# Altium PCB betrusted_evtx.PcbDoc (part 2 of 2)
Units mm, origin at the board's own origin, x right, y up, seen from the top; angles counter-clockwise.
Board outline 66 x 88 mm, 2 copper layers (Top Layer, Bottom Layer), stack 0.781 mm thick; 108 components, 62 nets, 1117 pads, 87 vias.
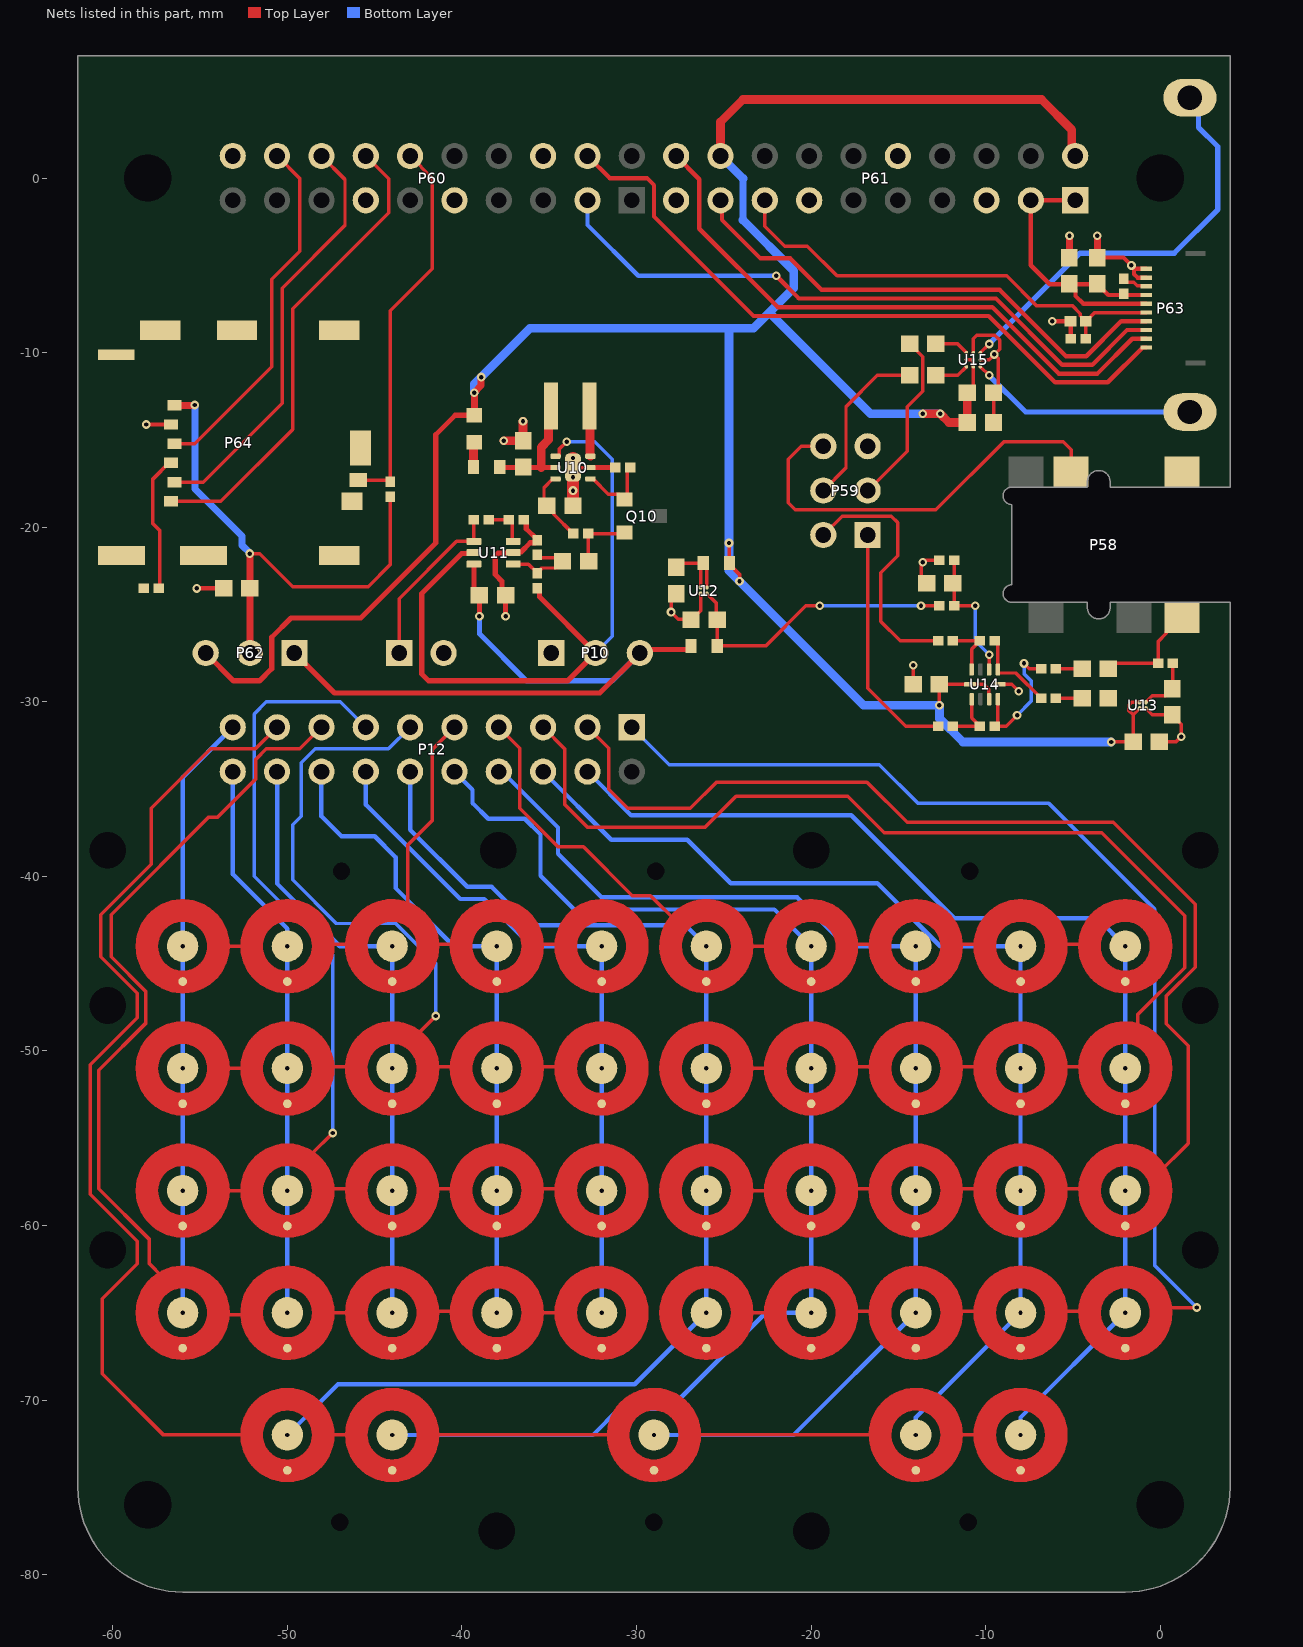
[diagram p2: the nets of this part, all layers, seen from the top]

## Via types
v1: diameter 0.5, hole 0.25, Top Layer to Bottom Layer, tented both sides, 85 vias
v2: diameter 0.5, hole 0.25, Top Layer to Bottom Layer, tented top, 2 vias

## Nets (pads, with @x,y where several pads share a name; then routed paths per layer and width w, separated by ;. In a path a pad name is that pad's centre, name@x,y a point inside that pad or via, vN(x,y) a via of type N, cw(c..) or ccw(c..) an arc to the next point about the centre after c; other vN are vias at no path point)
CTR_NOISE: C12.2 R13.1 R14.2 U11.1 | length 4.9
  Top Layer w0.2: U11.1@-37.065,-22.11 -36.19,-22.11 R13.1@-35.69,-22.61 ; R13.1@-35.69,-22.635 R13.1@-35.69,-22.61 ; R14.2@-35.69,-21.585 -35.515,-21.76 -34.44,-21.76 C12.2@-34.24,-21.96 -34.615,-22.335 -35.415,-22.335 R13.1@-35.69,-22.61
EXTCOMMIN: P61.17 P63.4 | length 29.5
  Top Layer w0.25: P61.17@-25.19,-1.27 -25.105,-1.355 -25.105,-2.395 -22.9,-4.6 -21.2,-4.6 -19.4,-6.4 -9.2,-6.4 -5.4,-10.2 -4.24,-10.2 -2.24,-8.2 P63.4@-0.8,-8.2
GND: C10.2 C11.2 C13.2 C14.2 C15.2 C16.2 C17.2 C18.2 C20.1 C23.2 C24.2 C25.2 C26.2 C27.1 C28.1 C29.1 P10.1 P11.2 P58.4 P59.5 P60.6 P60.9 P60.13 P60.20 P61.5 P61.10 P61.13 P61.19 P63.9 P63.10 P64.0 P64.C5 R14.1 R15.1 R16.1 R25.1 R27.1 R29.1 U10.5 U10.7 U11.2 U12.B2 U13.B2 U14.5 U15.A2 U15.B3 | length 49.1
  Top Layer w0.2: U10.7@-33.64,-16.58 U10.5@-32.64,-16.58 ; C13.2@-27.73,-23.8 -28.02,-24.09 v1(-28.02,-24.86) -27.62,-25.26 -26.92,-25.26 C14.2@-26.88,-25.3 -26.855,-25.3 -26.33,-24.775 U12.B2@-26.33,-23.8 ; C28.1@-14.15,-29 v1(-14.15,-27.9) ; C29.1@-13.375,-23.2 -13.7,-22.875 -13.7,-22.1 v1(-13.6,-22) -13.5,-21.9 R25.1@-12.65,-21.9 ; U15.A2@-10.7,-10 -10.7,-9.2 -10.5,-9 -9.475,-9 -9.2,-9.275 -9.2,-9.8 v1(-9.5,-10.1) ; U15.B3@-10.3,-10.4 -9.8,-10.4 v1(-9.5,-10.1) ; C17.2@-9.55,-14 C18.2@-9.55,-12.3 -9.275,-12.025 -9.275,-10.325 v1(-9.5,-10.1) ; U14.5@-9.2,-29 -8.5,-29 v1(-8.1,-29.4) ; U13.B2@-0.825,-30.375 -0.45,-30.75 C16.2@0.7,-30.75 0.7,-30.775 1.2,-31.275 v1(1.2,-32) 0.9,-32.3 C15.2@-0.05,-32.3
  Top Layer w0.25: v1@-58.1,-14.1 v1(-58.085,-14.115) P64.C5@-56.68,-14.115 ; v1(-55.2,-23.505) -55.195,-23.5 C23.2@-53.65,-23.5 ; v1@-6.2,-8.207 v1(-6.193,-8.2) C24.2@-5.14,-8.2 -5.133,-8.207 -5.133,-9.192 R27.1@-5.125,-9.2 ; C26.2@-3.6,-4.55 -2.1,-4.55 v1@-1.5,-5.15 ; P63.9@-0.8,-5.7 -1.3,-5.7 -1.5,-5.5 v1@-1.5,-5.15 ; P63.10@-0.8,-5.2 -1.45,-5.2 v1@-1.5,-5.15
  Top Layer w0.3: v1(-37.5,-25.1) C27.1@-37.5,-23.9 -37.7,-23.7 -37.7,-23.1 -38.09,-22.71 -38.09,-21.646 -37.914,-21.47 -37.075,-21.47 U11.2@-37.065,-21.46 -37.015,-21.41 -36.61,-21.41 -36.085,-20.885 -35.815,-20.885 -35.69,-20.76 R14.1@-35.69,-20.735 -35.69,-20.71 -36.315,-20.085 -36.315,-19.685 -36.44,-19.56 R15.1@-36.465,-19.56 ; U10.5@-32.64,-16.58 R16.1@-31.215,-16.58
  Top Layer w0.4: C25.2@-5.2,-4.55 v1(-5.2,-3.3) ; C26.2@-3.6,-4.55 v1(-3.6,-3.3)
  Top Layer w0.5: v1(-37.6,-15.05) C10.2@-36.5,-15.05 v1(-36.5,-13.935)
  Top Layer w0.7: C11.2@-33.64,-18.76 v1(-33.64,-17.9) v2(-33.64,-16.03)
  other v1: -1.65,-5
  other v2: -33.64,-17.13
HP_BYP: P58.2 P59.6 | length 24.2
  Top Layer w0.2: P59.6@-19.3,-15.36 -20.56,-15.36 -21.3,-16.1 -21.3,-18.6 -20.9,-19 -12.85,-19 -8.95,-15.1 -5.56,-15.1 -5.1,-15.56 P58.2@-5.1,-16.825
KEY0: P12.9 P13.2 P14.2 P15.2 P16.2 P17.2 | length 17.9
  Top Layer w0.2: -53.65,-44 -52.005,-44 ; -47.5,-43.9 -45.855,-43.9 ; -43.1,-41.7 -43.1,-38.2 -41.7,-36.8 -41.7,-32.73 P12.9@-40.43,-31.46 ; -41.8,-43.9 -40.155,-43.9 ; -35.5,-43.9 -33.855,-43.9
KEY1: P12.11 P23.2 P24.2 P25.2 P26.2 P27.2 | length 35.2
  Top Layer w0.2: -53.65,-51 -52.005,-51 ; -47.5,-50.9 -45.855,-50.9 ; -42.5,-49 v1(-41.5,-48) ; -41.8,-50.9 -40.155,-50.9 ; -35.5,-50.9 -33.855,-50.9
  Bottom Layer w0.2: P12.11@-42.97,-31.46 -44.21,-32.7 -48.4,-32.7 -49.2,-33.5 -49.2,-36.55 -49.7,-37.05 -49.7,-40.2 -47.2,-42.7 -43.79,-42.7 -41.5,-44.99 v1(-41.5,-48)
KEY2: P12.13 P33.2 P34.2 P35.2 P36.2 P37.2 | length 41.6
  Top Layer w0.2: -53.65,-58 -52.005,-58 ; -48.6,-56.1 -48.6,-55.9 v1(-47.4,-54.7) ; -47.5,-57.9 -45.855,-57.9 ; -41.8,-57.9 -40.155,-57.9 ; -35.5,-57.9 -33.855,-57.9
  Bottom Layer w0.2: v1(-47.4,-54.7) -47.4,-44.5 -51.9,-40 -51.9,-30.7 -51.2,-30 -46.97,-30 P12.13@-45.51,-31.46
KEY3: P12.15 P43.2 P44.2 P45.2 P46.2 P47.2 | length 49.4
  Top Layer w0.2: -56,-62.9 -57.2,-62.9 -57.9,-62.2 -57.9,-60.8 -60.8,-57.9 -60.8,-51.1 -58.1,-48.4 -58.1,-46.6 -60.1,-44.6 -60.1,-42.2 -54.5,-36.6 -54,-36.6 -51.8,-34.4 -51.8,-33.3 -51.2,-32.7 -49.29,-32.7 P12.15@-48.05,-31.46 ; -53.9,-65.1 -52.255,-65.1 -52.047,-64.892 ; -47.95,-65 -46.305,-65 ; -41.7,-64.9 -40.055,-64.9 ; -35.95,-65 -34.305,-65
KEY4: P12.7 P18.2 P19.2 P20.2 P21.2 P22.2 | length 23.7
  Top Layer w0.2: P12.7@-37.89,-31.46 -36.7,-32.65 -36.7,-36.1 -34.5,-38.3 -33.04,-38.3 -30.24,-41.1 -29.2,-41.1 -27.592,-42.708 -27.5,-42.8 ; -23.65,-44 -22.005,-44 ; -17.5,-43.9 -15.855,-43.9 ; -11.8,-43.9 -10.155,-43.9 ; -5.5,-43.9 -3.855,-43.9
KEY5: P12.5 P28.2 P29.2 P30.2 P31.2 P32.2 | length 59
  Top Layer w0.2: P12.5@-35.35,-31.46 -34.1,-32.71 -34.1,-35.9 -32.8,-37.2 -26.1,-37.2 -24.3,-35.4 -17.9,-35.4 -15.8,-37.5 -3.35,-37.5 1.4,-42.25 1.4,-45.225 -1.3,-47.925 -1.3,-49 ; -23.65,-51 -22.05,-51 -22.005,-51 ; -17.5,-50.9 -16.048,-50.9 -15.855,-50.9 ; -11.8,-50.9 -10.155,-50.9 ; -5.5,-50.9 -4.048,-50.9 -3.855,-50.9
KEY6: P12.3 P38.2 P39.2 P40.2 P41.2 P42.2 | length 65.8
  Top Layer w0.2: P12.3@-32.81,-31.46 -31.6,-32.67 -31.6,-35 -30.5,-36.1 -26.92,-36.1 -25.42,-34.6 -16.8,-34.6 -14.5,-36.9 -2.7,-36.9 2,-41.6 2,-45.2 0.35,-46.85 0.35,-48.45 1.6,-49.7 1.6,-55.3 -0.172,-57.072 -0.3,-57.2 ; -23.65,-58 -22.005,-58 ; -17.5,-57.9 -15.855,-57.9 ; -11.8,-57.9 -10.155,-57.9 ; -5.5,-57.9 -3.855,-57.9
KEY7: P12.1 P48.2 P49.2 P50.2 P51.2 P52.2 | length 66.6
  Top Layer w0.2: -23.65,-65 -22.005,-65 ; -17.5,-64.9 -15.855,-64.9 ; -11.8,-64.9 -10.155,-64.9 ; -5.5,-64.9 -3.855,-64.9 ; 0.3,-64.7 v1(2.1,-64.7) v1@2.2,-64.8
  Bottom Layer w0.2: P12.1@-30.27,-31.46 -28.13,-33.6 -16.1,-33.6 -13.9,-35.8 -6.4,-35.8 -0.3,-41.9 -0.3,-62.3 v1(2.1,-64.7)
KEY8: P12.17 P53.2 P54.2 P55.2 P56.2 P57.2 | length 82
  Top Layer w0.2: -52.1,-72 -57.1,-72 -60.6,-68.5 -60.6,-64.2 -58.6,-62.2 -58.6,-60.9 -61.3,-58.2 -61.3,-50.8 -58.6,-48.1 -58.6,-46.7 -60.7,-44.6 -60.7,-42.2 -57.8,-39.3 -57.8,-36.1 -54.4,-32.7 -51.83,-32.7 P12.17@-50.59,-31.46 ; -47.5,-72 -45.855,-72 ; -41.95,-72 -31.145,-72 -31.048,-71.902 ; -26.95,-72 -16.412,-72 -16.01,-72.402 ; -11.4,-72 -9.755,-72
KEY9: P12.19 P13.1 P23.1 P33.1 P43.1 | length 34.7
  Bottom Layer w0.25: v1(-56,-65) v1(-56,-58) v1(-56,-51) v1(-56,-44) -56,-34.33 P12.19@-53.13,-31.46
KEY10: P12.20 P14.1 P24.1 P34.1 P44.1 | length 32.3
  Bottom Layer w0.25: P12.20@-53.13,-34 -53.13,-39.87 -50,-43 v1(-50,-44) v1(-50,-51) v1(-50,-58) v1(-50,-65)
KEY11: P12.18 P15.1 P25.1 P35.1 P45.1 | length 35.5
  Bottom Layer w0.25: P12.18@-50.59,-34 -50.59,-40.41 -47,-44 v1(-44,-44) v1(-44,-51) v1(-44,-58) v1(-44,-65)
KEY12: P12.16 P16.1 P26.1 P36.1 P46.1 | length 37.7
  Bottom Layer w0.25: P12.16@-48.05,-34 -48.05,-36.55 -46.9,-37.7 -45,-37.7 -43.8,-38.9 -43.8,-40.67 -40.47,-44 v1(-38,-44) v1(-38,-51) v1(-38,-58) v1(-38,-65)
KEY13: P12.14 P17.1 P27.1 P37.1 P47.1 | length 39.8
  Bottom Layer w0.25: P12.14@-45.51,-34 -45.51,-35.89 -40.1,-41.3 -38.714,-41.3 -36.014,-44 v1(-32,-44) v1(-32,-51) v1(-32,-58) v1(-32,-65)
KEY14: P12.12 P18.1 P28.1 P38.1 P48.1 P53.1 | length 71
  Bottom Layer w0.25: v1(-50,-72) -47.1,-69.1 -30.1,-69.1 v1(-26,-65) v1(-26,-58) v1(-26,-51) v1(-26,-44) -27.2,-42.8 -36.1,-42.8 -38.3,-40.6 -39.7,-40.6 -42.97,-37.33 P12.12@-42.97,-34
KEY15: P12.10 P19.1 P29.1 P39.1 P49.1 P54.1 | length 74.3
  Bottom Layer w0.25: v1(-44,-72) -32.5,-72 -31,-70.5 -28.1,-70.5 -22.6,-65 v1(-20,-65) v1(-20,-58) v1(-20,-51) v1(-20,-44) -22.1,-41.9 -33.57,-41.9 -35.5,-39.97 -35.5,-37.6 -36.4,-36.7 -38.5,-36.7 -39.395,-35.805 -39.395,-35.035 P12.10@-40.43,-34
KEY16: P12.8 P20.1 P30.1 P40.1 P50.1 P55.1 | length 67.8
  Bottom Layer w0.25: P12.8@-37.89,-34 -37.7,-34 -34.5,-37.2 -34.5,-38.7 -32,-41.2 -20.8,-41.2 -18,-44 v1(-14,-44) v1(-14,-51) v1(-14,-58) v1(-14,-65) -21,-72 v1(-29,-72)
KEY17: P12.6 P21.1 P31.1 P41.1 P51.1 P56.1 | length 62
  Bottom Layer w0.25: P12.6@-35.35,-34 -31.45,-37.9 -27.1,-37.9 -24.6,-40.4 -16.2,-40.4 -12.6,-44 v1(-8,-44) v1(-8,-51) v1(-8,-58) v1(-8,-65) -14,-71 v1(-14,-72)
KEY18: P12.4 P22.1 P32.1 P42.1 P52.1 P57.1 | length 65.4
  Bottom Layer w0.25: P12.4@-32.81,-34 -30.31,-36.5 -17.7,-36.5 -11.8,-42.4 -3.6,-42.4 v1(-2,-44) v1(-2,-51) v1(-2,-58) v1(-2,-65) -8,-71 v1(-8,-72)
LCD_DISP: C24.1 P61.15 P63.5 R27.2 | length 26.9
  Top Layer w0.2: P61.15@-22.65,-1.27 -22.65,-2.75 -21.5,-3.9 -20.215,-3.9 -18.515,-5.6 -8.8,-5.6 -7.1,-7.3 -5.05,-7.3 -4.585,-7.765 -4.585,-7.895 -4.28,-8.2 C24.1@-4.26,-8.2 ; R27.2@-4.275,-9.2 -4.26,-9.185 C24.1@-4.26,-8.2 ; P63.5@-0.8,-7.7 -3.74,-7.7 -4.24,-8.2 C24.1@-4.26,-8.2
LCD_SCLK: P60.4 P63.1 | length 39.3
  Top Layer w0.25: P60.4@-32.81,1.27 -31.54,0 -29.4,0 -29,-0.4 -29,-2.2 -23.3,-7.9 -9.821,-7.9 -6.021,-11.7 -3,-11.7 -1,-9.7 P63.1@-0.8,-9.7
LCD_SCS: P60.3 P63.3 | length 37.6
  Top Layer w0.25: v1(-22,-5.6) -20.7,-6.9 -9.407,-6.9 -5.607,-10.7 -3.9,-10.7 -1.9,-8.7 P63.3@-0.8,-8.7
  Bottom Layer w0.25: P60.3@-32.81,-1.27 -32.81,-2.69 -29.9,-5.6 v1(-22,-5.6)
LCD_SI: P61.20 P63.2 | length 34.6
  Top Layer w0.25: P61.20@-27.73,1.27 -26.4,-0.06 -26.4,-2.9 -21.9,-7.4 -9.614,-7.4 -5.814,-11.2 -3.6,-11.2 -1.6,-9.2 P63.2@-0.8,-9.2
MICBIAS: C16.1 R18.2 U13.A2 | length 3.3
  Top Layer w0.2: U13.A2@-0.825,-30.025 -0.45,-29.65 0.325,-29.65 0.725,-29.25 R18.2@0.725,-27.8
NetC19_1: C19.1 P58.1 R18.1 | length 6.2
  Top Layer w0.2: C19.1@-2.97,-28.1 -2.67,-27.8 R18.1@-0.125,-27.8 -0.125,-26.55 0.35,-26.075 0.35,-25.95 1.125,-25.175 P58.1@1.25,-25.175
NetC19_2: C19.2 R21.2 | length 1.5
  Top Layer w0.2: R21.2@-5.975,-28.1 C19.2@-4.47,-28.1
NetC20_2: C20.2 R19.2 | length 1.5
  Top Layer w0.2: R19.2@-5.975,-29.8 C20.2@-4.47,-29.8
NetC21_1: C21.1 U15.C1 | length 2
  Top Layer w0.2: C21.1@-12.85,-11.3 -11.6,-11.3 U15.C1@-11.1,-10.8
NetC21_2: C21.2 P59.4 | length 9.7
  Top Layer w0.2: P59.4@-19.3,-17.9 -18,-16.6 -18,-13.1 -16.2,-11.3 C21.2@-14.35,-11.3
NetC22_1: C22.1 P59.3 | length 10
  Top Layer w0.2: P59.3@-16.76,-17.9 -14.5,-15.64 -14.5,-13.1 -13.6,-12.2 -13.6,-10.225 -14.325,-9.5 C22.1@-14.35,-9.5
NetC22_2: C22.2 U15.A1 | length 2
  Top Layer w0.2: C22.2@-12.85,-9.5 -11.6,-9.5 U15.A1@-11.1,-10
NetP59_1: P59.1 R22.1 | length 13.7
  Top Layer w0.2: P59.1@-16.76,-20.44 -16.76,-29.215 -14.575,-31.4 R22.1@-12.725,-31.4
NetP59_2: P59.2 R20.1 | length 14.7
  Top Layer w0.2: P59.2@-19.3,-20.44 -18.22,-19.36 -15.4,-19.36 -15.03,-19.73 -15.03,-21.63 -16,-22.6 -16,-25.4 -14.9,-26.5 R20.1@-12.725,-26.5
NetP63_8: P63.8 R28.1 | length 1.5
  Top Layer w0.2: R28.1@-2.1,-5.775 -2.1,-5.8 -1.925,-5.975 -1.525,-5.975 -1.325,-6.175 -0.825,-6.175 P63.8@-0.8,-6.2
NetP64_C6: P64.C6 R29.2 | length 7.9
  Top Layer w0.2: R29.2@-57.375,-23.5 -57.3,-23.425 -57.3,-20.2 -57.7,-19.8 -57.7,-17.235 -56.78,-16.315 P64.C6@-56.68,-16.315
NetR11_2: R11.2 R15.2 U11.3 | length 2.5
  Top Layer w0.2: R11.2@-38.465,-19.56 R15.2@-37.315,-19.56 -37.29,-19.56 -37.115,-19.735 -37.115,-20.76 U11.3@-37.065,-20.81
NetR17_1: R17.1 R20.2 U14.9 | length 3.4
  Top Layer w0.2: R20.2@-11.875,-26.5 R17.1@-10.35,-26.5 ; U14.9@-10.8,-28.15 -10.8,-26.975 -10.525,-26.7 -10.525,-26.675 R17.1@-10.35,-26.5 ; R17.1@-10.325,-26.5 R17.1@-10.35,-26.5
NetR17_2: R17.2 R19.1 U14.6 | length 5
  Top Layer w0.2: R17.2@-9.475,-26.5 -9.3,-26.675 U14.6@-9.3,-28.15 -9.3,-28.325 -9.275,-28.35 -8.275,-28.35 R19.1@-6.825,-29.8
NetR21_1: R21.1 R24.2 U14.4 | length 7.7
  Top Layer w0.2: U14.4@-9.3,-29.85 -9.3,-31.225 R24.2@-9.475,-31.4 -8.825,-31.4 v1(-8.2,-30.775) ; v1(-7.8,-27.8) -7.5,-28.1 R21.1@-6.825,-28.1
  Bottom Layer w0.2: v1(-8.2,-30.775) -7.4,-29.975 -7.4,-28.8 -7.8,-28.4 v1(-7.8,-27.8)
NetR22_2: R22.2 R24.1 U14.1 | length 3.3
  Top Layer w0.2: R22.2@-11.875,-31.4 R24.1@-10.35,-31.4 ; U14.1@-10.8,-29.85 -10.8,-30.925 -10.525,-31.2 -10.525,-31.225 R24.1@-10.35,-31.4 ; R24.1@-10.325,-31.4 R24.1@-10.35,-31.4
NetTP10_1: TP10.1 U15.A3 | length 24.1
  Top Layer w0.2: U15.A3@-10.3,-10 v1(-9.8,-9.5)
  Bottom Layer w0.3: v1(-9.8,-9.5) -4.6,-4.3 0.8,-4.3 3.3,-1.8 3.3,1.8 2.2,2.9 2.2,4.1 TP10.1@1.7,4.6
NetTP11_1: TP11.1 U15.C3 | length 13.1
  Top Layer w0.2: U15.C3@-10.3,-10.8 v1(-9.8,-11.3)
  Bottom Layer w0.3: v1(-9.8,-11.3) -7.7,-13.4 TP11.1@1.7,-13.4
NOISE: P11.1 R11.1 U11.4 | length 10
  Top Layer w0.2: P11.1@-43.59,-27.2 -43.59,-24.09 -40.31,-20.81 U11.4@-39.315,-20.81 R11.1@-39.315,-19.56
NOISE_ON: P10.2 R13.2 U10.1 U11.5 | length 40.1
  Top Layer w0.2: U10.1@-34.64,-15.93 -34.49,-15.93 -34.44,-15.88 -34.44,-15.54 v1(-34,-15.1)
  Top Layer w0.3: U11.5@-39.315,-21.46 -39.365,-21.51 -40.01,-21.51 -42.3,-23.8 -42.3,-28.4 -41.9,-28.8 -33.95,-28.8 P10.2@-32.35,-27.2 -35.565,-23.985 -35.565,-23.61 R13.2@-35.69,-23.485
  Bottom Layer w0.2: v1(-34,-15.1) -32.4,-15.1 -31.4,-16.1 -31.4,-26.25 P10.2@-32.35,-27.2
NPN_NOISE: C12.1 Q10.2 R12.1 | length 3.7
  Top Layer w0.2: C12.1@-32.74,-21.96 -32.765,-21.935 R12.1@-32.765,-20.36 -30.74,-20.36 Q10.2@-30.69,-20.31
P1.8V: C14.1 C27.2 J12.1 P10.3 P62.1 R23.2 U11.6 U12.A2 | length 56.8
  Top Layer w0.2: U12.A2@-25.98,-23.8 -25.42,-24.36 -25.42,-25.26 C14.1@-25.38,-25.3 J12.1@-25.38,-26.8 -22.6,-26.8 -20.3,-24.5 v1(-19.5,-24.5) ; v1(-13.7,-24.5) R23.2@-12.65,-24.5
  Top Layer w0.3: P62.1@-49.6,-27.2 -47.3,-29.5 -32.11,-29.5 P10.3@-29.81,-27.2 -29.61,-27 -27.055,-27 -26.88,-26.825 J12.1@-26.88,-26.8 ; U11.6@-39.315,-22.11 -39.315,-23.585 C27.2@-39,-23.9 v1(-39,-25.1)
  Bottom Layer w0.2: v1(-19.5,-24.5) v1(-13.7,-24.5)
  Bottom Layer w0.3: v1(-39,-25.1) -39,-26.1 -36.3,-28.8 -31.41,-28.8 P10.3@-29.81,-27.2
P3.3V: C13.1 C15.1 C17.1 C18.1 C28.2 J11.1 P61.2 P61.18 P62.3 R10.2 U12.A1 U12.B1 U13.A1 U13.B1 U14.3 U14.10 U15.B1 U15.B2 U15.C2 | length 160.5
  Top Layer w0.2: C13.1@-27.73,-22.3 -27.49,-22.06 J11.1@-26.17,-22.06 ; U12.B1@-26.33,-23.45 -26.33,-22.22 J11.1@-26.17,-22.06 ; U12.A1@-25.98,-23.45 -25.98,-22.25 J11.1@-26.17,-22.06 ; v1(-24.7,-20.9) -24.7,-22.03 J11.1@-24.67,-22.06 -24.67,-22.135 -24.1,-22.705 v1(-24.1,-23.1) ; v1(-12.65,-30.2) C28.2@-12.65,-29 U14.10@-10.9,-29 -10.1,-29 -9.825,-29.275 -9.825,-29.825 U14.3@-9.8,-29.85 ; U15.B1@-11.1,-10.4 U15.B2@-10.7,-10.4 U15.C2@-10.7,-10.8 -10.7,-11.95 C18.1@-11.05,-12.3 ; v1(-2.8,-32.3) C15.1@-1.55,-32.3 -1.55,-30.75 ; U13.B1@-1.175,-30.375 -1.55,-30.75 ; U13.A1@-1.175,-30.025 -1.625,-30.025 -1.8,-30.2 -1.8,-30.5 -1.55,-30.75
  Top Layer w0.3: P62.3@-54.68,-27.2 -53.08,-28.8 -51.6,-28.8 -50.9,-28.1 -50.9,-26.3 -49.8,-25.2 -45.8,-25.2 -41.5,-20.9 -41.5,-14.7 -40.385,-13.585 R10.2@-39.29,-13.585
  Top Layer w0.4: R10.2@-39.29,-13.585 v1(-39.29,-12.3) -39.29,-12.273 -38.9,-11.883 v1(-38.9,-11.4)
  Top Layer w0.5: P61.18@-25.19,1.27 -25.19,3.21 -23.9,4.5 -6.8,4.5 -5.061,2.761 -5.061,1.461 P61.2@-4.87,1.27 ; v1(-13.6,-13.5) v1(-12.6,-13.5) -12.1,-14 C17.1@-11.05,-14 C18.1@-11.05,-12.3
  Bottom Layer w0.3: -24.8,-8.6 -24.7,-8.7
  Bottom Layer w0.4: -23.9,-2.4 -23.9,-0.02
  Bottom Layer w0.5: v1(-39.29,-12.3) -39.29,-11.79 -36.1,-8.6 -24.8,-8.6 -23.3,-8.6 -22.4,-7.7 ; P61.18@-25.19,1.27 -23.9,-0.02 ; -24.7,-8.7 v1(-24.7,-20.9) -24.7,-22.5 -17,-30.2 v1(-12.65,-30.2) -12.65,-30.95 -11.3,-32.3 v1(-2.8,-32.3) ; -23.9,-2.4 -21,-5.3 -21,-6.3 -22.4,-7.7 ; v1(-12.6,-13.5) -16.6,-13.5 -22.4,-7.7
P5.0V: C25.1 C26.1 P61.1 P61.3 P63.6 P63.7 R28.2 | length 18.6
  Top Layer w0.25: P61.1@-4.87,-1.27 P61.3@-7.41,-1.27 -7.41,-4.99 -6.325,-6.075 C25.1@-5.175,-6.075 ; P63.6@-0.8,-7.2 -4.4,-7.2 -4.85,-6.75 -4.85,-6.4 C25.1@-5.175,-6.075 ; P63.7@-0.8,-6.7 -2.975,-6.7 -3.6,-6.075 C25.1@-5.175,-6.075
SIM_CLK: P60.16 P64.C3 | length 24.3
  Top Layer w0.2: P64.C3@-56.48,-17.415 -54.815,-17.415 -50.3,-12.9 -50.3,-6.3 -46.7,-2.7 -46.7,-0.08 P60.16@-48.05,1.27
SIM_DET: P60.12 P64.SW R26.1 | length 22.1
  Top Layer w0.2: P64.SW@-45.93,-17.3 -44.2,-17.3 R26.1@-44.1,-17.4 -44.1,-7.6 -41.7,-5.2 -41.7,0 P60.12@-42.97,1.27
SIM_IO: P60.14 P64.C7 | length 27.2
  Top Layer w0.2: P64.C7@-56.68,-18.515 -53.815,-18.515 -49.7,-14.4 -49.7,-7.49 -44.2,-1.99 -44.2,-0.04 P60.14@-45.51,1.27
SIM_RST: P60.18 P64.C2 | length 20.7
  Top Layer w0.2: P64.C2@-56.48,-15.215 -55.315,-15.215 -50.9,-10.8 -50.9,-5.8 -49.3,-4.2 -49.3,-0.02 P60.18@-50.59,1.27
SIM_VCC: C23.1 P62.2 P64.C1 R26.2 | length 29.9
  Top Layer w0.2: v1(-52.15,-21.51) -51.59,-21.51 -49.7,-23.4 -45.365,-23.4 -44.1,-22.135 R26.2@-44.1,-18.25
  Top Layer w0.4: P64.C1@-56.48,-13.015 -55.315,-13.015 v1(-55.3,-13) ; v1(-52.15,-21.51) C23.1@-52.15,-23.5 -52.145,-23.505 -52.145,-27.195 P62.2@-52.14,-27.2
  Bottom Layer w0.4: v1(-55.3,-13) -55.3,-17.8 -52.6,-20.5 -52.6,-21.033 -52.15,-21.483 v1(-52.15,-21.51)
VAVA: C11.1 R12.2 U10.3 | length 4.2
  Top Layer w0.2: U10.3@-34.64,-17.23 -34.79,-17.23 -35.3,-17.74 -35.3,-18.6 C11.1@-35.14,-18.76 -35.115,-18.76 -34.74,-19.135 -34.74,-19.26 -33.64,-20.36 R12.2@-33.615,-20.36
VAVA_FBK: Q10.1 R16.2 U10.4 | length 4.4
  Top Layer w0.2: U10.4@-32.64,-17.23 -32.49,-17.23 -31.61,-18.11 -30.99,-18.11 Q10.1@-30.69,-18.41 -30.54,-18.26 -30.54,-16.755 R16.2@-30.365,-16.58
VAVA_SW: L10.2 U10.6 | length 2.9
  Top Layer w0.5: L10.2@-32.69,-13.06 -32.665,-13.085 -32.665,-15.905 U10.6@-32.64,-15.93
VOCM: C29.2 R23.1 R25.2 U14.7 | length 7.8
  Top Layer w0.2: R25.2@-11.8,-21.9 R23.1@-11.8,-24.5 v1(-10.6,-24.5) ; U14.7@-9.8,-28.15 v1(-9.8,-27.3)
  Bottom Layer w0.2: v1(-10.6,-24.5) -10.6,-26.5 v1(-9.8,-27.3)
VSYS: C10.1 J10.1 L10.1 R10.1 U10.2 | length 8.4
  Top Layer w0.2: R10.1@-39.34,-15.185 R10.1@-39.29,-15.135 R10.1@-39.265,-15.135 ; J10.1@-37.84,-16.56 J10.1@-37.82,-16.58
  Top Layer w0.3: J10.1@-37.82,-16.58 -35.465,-16.58 U10.2@-34.64,-16.58
  Top Layer w0.5: J10.1@-39.34,-16.56 R10.1@-39.34,-15.185 ; -35.465,-16.58 -35.465,-15.415 -35.04,-14.99 -35.04,-13.21 L10.1@-34.89,-13.06
pads on no net: P12.2 P58.3 P58.5 P58.6 P60.1 P60.2 P60.5 P60.7 P60.8 P60.10 P60.11 P60.15 P60.17 P60.19 P61.4 P61.6 P61.7 P61.8 P61.9 P61.11 P61.12 P61.14 P61.16 P63.0 Q10.3 U10.0 U14.2 U14.8

## Polygon pours and split planes (outlines as drawn)
GND on Bottom Layer "gnd-poly" (solid, remove dead copper, pour order 0): -62,-31.5 -22.2,-31.5 -19.1,-34.6 4,-34.6 4,7 -62,7
GND on Top Layer "gnd_top" (solid, remove dead copper, pour order 2): -62,-31.5 -22.3,-31.5 -20.3,-33.5 -15.9,-33.5 -14.8,-34.6 4,-34.6 4,7 -62,7

## Keep-outs
Keep-Out Layer:
  lines w0.5: 4,-24.3 4,-75 cw(c-2,-75) -2,-81 -56,-81 cw(c-56,-75) -62,-75 -62,7 4,7 4,-17.7

## Silkscreen, mask and mechanical layers (free items; w line width, h text height)
Top Overlay:
  lines w0.2: -41.373,-9.328 ccw(c-40.506,-9.328) -40.506,-10.196 -33.245,-10.196 ccw(c-33.245,-9.18) -32.229,-9.18 -32.229,-4.608 ccw(c-33.245,-4.608) -33.245,-3.592 -40.357,-3.592 ccw(c-40.357,-4.608) -41.373,-4.608 -41.373,-9.328
  text "betrusted.io XT1" at -31.5,-5.282 h1.4
  text "Designed in" at -31.529,-6.729 h1.4
  text "Singapore" at -31.556,-7.924 h1.4
  text "02/19" at -31.541,-9.38 h1.4
  text "HP" at -21.25,-17 h1 r90
  text "MIC" at -21.25,-20.75 h1 r90
  text "3.3" at -55.3,-29.75 h1
  text "1.8" at -51.25,-29.75 h1
  text "OUT" at -45.25,-29.75 h1
  text "GND" at -41.75,-29.75 h1
  text "OFF" at -35.5,-29.75 h1
  text "ON" at -31.25,-29.75 h1
Bottom Overlay:
  circle w0.2: c-38.229,-8.35 r0.811
  rectangle: -18.75,-71.25 1.75,-64.75
  text "c  2019 Sutajio Ko-Usagi" at -37.816,-8.809 h2
  text "Copyrights: CERN OHL v1.2" at -37.716,-10.859 h2
  text "Patents: Apache 2.0" at -37.754,-12.8 h2
  text "bunnie@kosagi.com" at -37.754,-14.5 h1.5
Top Solder:
  rectangle: 0,-2.75 4,2.75
  rectangle: -62,-34.25 -58.25,-25.5
  rectangle: -62,-2.75 -57.75,7
Bottom Solder:
  rectangle: 0,-2.75 4,2.75
  rectangle: -10,4 -2,7
  rectangle: -62,-2.75 -57.75,7
  rectangle: -62,-34.25 -58.25,-25.5
Mechanical 1:
  the board outline again, w0.1
  text "Board cutting outline" at -45.75,9.75 h2
Mechanical 3:
  drawing of 191 lines, arcs and shapes, not listed
  text "Layer" at 18.909,1.454 h1.52
  text "Name" at 29.32,1.454 h1.52
  text "Material" at 52.936,1.454 h1.52
  text "Thickness" at 74.774,1.454 h1.52
  text "Constant" at 91.28,1.454 h1.52
  text "Board Layer Stack" at 105.754,1.454 h1.52
  text "1" at 18.909,-1.594 h1.52
  text "Top Overlay" at 29.32,-1.594 h1.52
  text "2" at 18.909,-4.642 h1.52
  text "Top Solder" at 29.32,-4.642 h1.52
  text "Solder Resist" at 52.936,-4.642 h1.52
  text "0.010mm" at 74.774,-4.642 h1.52
  text "3.5" at 91.28,-4.642 h1.52
  text "3" at 18.909,-7.69 h1.52
  text "Top Layer" at 29.32,-7.69 h1.52
  text "Copper" at 52.936,-7.69 h1.52
  text "0.036mm" at 74.774,-7.69 h1.52
  text "4" at 18.909,-10.738 h1.52
  text "Dielectric 1" at 29.32,-10.738 h1.52
  text "FR-4" at 52.936,-10.738 h1.52
  text "0.710mm" at 74.774,-10.738 h1.52
  text "4.8" at 91.28,-10.738 h1.52
  text "5" at 18.909,-13.786 h1.52
  text "Bottom Layer" at 29.32,-13.786 h1.52
  text "Copper" at 52.936,-13.786 h1.52
  text "0.036mm" at 74.774,-13.786 h1.52
  text "6" at 18.909,-16.834 h1.52
  text "Bottom Solder" at 29.32,-16.834 h1.52
  text "Solder Resist" at 52.936,-16.834 h1.52
  text "0.010mm" at 74.774,-16.834 h1.52
  text "3.5" at 91.28,-16.834 h1.52
  text "7" at 18.909,-19.882 h1.52
  text "Bottom Overlay" at 29.32,-19.882 h1.52
  text "Total thickness: 0.8mm +/-0.1mm" at 19.75,-25.1 h2
  text "Finish: immersion gold" at 19.5,-30 h2
  text "Soldermask color: green" at 19.25,-35.25 h2
  text "Silkscreen: white" at 19,-41 h2
Drill Drawing:
  circle w0.254: c19.056,-52.708 r0.847
  lines w0.254: 18.209,-72.182 18.633,-72.182 19.056,-72.605 19.479,-72.182 19.903,-72.182 19.479,-71.758 19.903,-71.335 19.479,-71.335 19.056,-70.912 18.633,-71.335 18.209,-71.335 18.633,-71.758 18.209,-72.182 ; 18.209,-68.795 19.903,-68.795 19.903,-67.102 18.209,-67.102 18.209,-68.795 ; 18.209,-64.562 18.633,-64.562 18.633,-64.985 19.479,-64.985 19.479,-64.562 19.903,-64.562 19.903,-63.715 19.479,-63.715 19.479,-63.292 18.633,-63.292 18.633,-63.715 18.209,-63.715 18.209,-64.562 ; 18.209,-61.175 19.056,-60.752 19.903,-61.175 19.479,-60.328 19.903,-59.482 19.056,-59.905 18.209,-59.482 18.633,-60.328 18.209,-61.175 ; 18.209,-55.672 19.903,-55.672 19.056,-57.365 18.209,-55.672
  lines w0.381: 16.691,-73.748 357.767,-73.748 ; 16.691,-50.888 357.767,-50.888 ; 30.683,-77.558 30.683,-47.078 ; 45.665,-77.558 45.665,-47.078 ; 74.866,-77.558 74.866,-47.078 ; 87.715,-77.558 87.715,-47.078 ; 106.354,-77.558 106.354,-47.078 ; 144.443,-77.558 144.443,-47.078 ; 159.425,-77.558 159.425,-47.078 ; 178.368,-77.558 178.368,-47.078 ; 204.269,-77.558 204.269,-47.078 ; 225.954,-77.558 225.954,-47.078 ; 259.828,-77.558 259.828,-47.078 ; 293.701,-77.558 293.701,-47.078 ; 322.141,-77.558 322.141,-47.078 ; 16.691,-77.558 357.767,-77.558 357.767,-47.078 16.691,-47.078 16.691,-77.558
  text "Symbol" at 18.977,-49.745 h1.83
  text "Count" at 31.826,-49.745 h1.83
  text "Hole Size" at 46.808,-49.745 h1.83
  text "Plated" at 76.009,-49.745 h1.83
  text "Hole Type" at 88.858,-49.745 h1.83
  text "Drill Layer Pair" at 107.497,-49.745 h1.83
  text "Via/Pad" at 145.586,-49.745 h1.83
  text "Pad Shape" at 160.568,-49.745 h1.83
  text "Template" at 179.511,-49.745 h1.83
  text "Description" at 205.412,-49.745 h1.83
  text "Hole Tolerance (+)" at 227.097,-49.745 h1.83
  text "Hole Tolerance (-)" at 260.971,-49.745 h1.83
  text "Hole Length" at 294.844,-49.745 h1.83
  text "Routed Path Length" at 323.284,-49.745 h1.83
  text "2" at 31.826,-53.555 h1.52
  text "1.397mm (55.00mil)" at 46.808,-53.555 h1.52
  text "PTH" at 76.009,-53.555 h1.52
  text "Round" at 88.858,-53.555 h1.52
  text "Top Layer - Bottom Layer" at 107.497,-53.555 h1.52
  text "Pad" at 145.586,-53.555 h1.52
  text "Rounded" at 160.568,-53.555 h1.52
  text "r305_216h140r100" at 179.511,-53.555 h1.52
  text "-" at 294.844,-53.555 h1.52
  text "-" at 323.284,-53.555 h1.52
  text "4" at 31.826,-57.365 h1.52
  text "2.700mm (106.30mil)" at 46.808,-57.365 h1.52
  text "NPTH" at 76.009,-57.365 h1.52
  text "Round" at 88.858,-57.365 h1.52
  text "Top Layer - Bottom Layer" at 107.497,-57.365 h1.52
  text "Pad" at 145.586,-57.365 h1.52
  text "Rounded" at 160.568,-57.365 h1.52
  text "c250hn270m400" at 179.511,-57.365 h1.52
  text "-" at 294.844,-57.365 h1.52
  text "-" at 323.284,-57.365 h1.52
  text "6" at 31.826,-61.175 h1.52
  text "1.000mm (39.37mil)" at 46.808,-61.175 h1.52
  text "NPTH" at 76.009,-61.175 h1.52
  text "Slot" at 88.858,-61.175 h1.52
  text "Top Layer - Bottom Layer" at 107.497,-61.175 h1.52
  text "Pad" at 145.586,-61.175 h1.52
  text "Rectangle" at 160.568,-61.175 h1.52
  text "s0hn100_300" at 179.511,-61.175 h1.52
  text "3.000mm (118.11mil)" at 294.844,-61.175 h1.52
  text "2.000mm (78.74mil)" at 323.284,-61.175 h1.52
  text "10" at 31.826,-64.985 h1.52
  text "2.100mm (82.68mil)" at 46.808,-64.985 h1.52
  text "NPTH" at 76.009,-64.985 h1.52
  text "Round" at 88.858,-64.985 h1.52
  text "Top Layer - Bottom Layer" at 107.497,-64.985 h1.52
  text "Pad" at 145.586,-64.985 h1.52
  text "Rectangle" at 160.568,-64.985 h1.52
  text "s0hn210" at 179.511,-64.985 h1.52
  text "-" at 294.844,-64.985 h1.52
  text "-" at 323.284,-64.985 h1.52
  text "74" at 31.826,-68.795 h1.52
  text "0.900mm (35.43mil)" at 46.808,-68.795 h1.52
  text "PTH" at 76.009,-68.795 h1.52
  text "Round" at 88.858,-68.795 h1.52
  text "Top Layer - Bottom Layer" at 107.497,-68.795 h1.52
  text "Pad" at 145.586,-68.795 h1.52
  text "(Mixed)" at 160.568,-68.795 h1.52
  text "(Mixed)" at 179.511,-68.795 h1.52
  text "-" at 294.844,-68.795 h1.52
  text "-" at 323.284,-68.795 h1.52
  text "87" at 31.826,-72.605 h1.52
  text "0.250mm (9.84mil)" at 46.808,-72.605 h1.52
  text "PTH" at 76.009,-72.605 h1.52
  text "Round" at 88.858,-72.605 h1.52
  text "Top Layer - Bottom Layer" at 107.497,-72.605 h1.52
  text "Via" at 145.586,-72.605 h1.52
  text "Rounded" at 160.568,-72.605 h1.52
  text "(Mixed)" at 179.511,-72.605 h1.52
  text "-" at 294.844,-72.605 h1.52
  text "-" at 323.284,-72.605 h1.52
  text "183 Total" at 31.826,-76.415 h1.52
  text "Slot definitions :" at 18.977,-80.097 h1.52
  text "Routed Path Length" at 45.207,-80.097 h1.52
  text "= Calculated from tool start centre position to tool end centre position." at 73.215,-80.097 h1.52
  text "Hole Length" at 45.207,-82.637 h1.52
  text "= Routed Path Length + Tool Size = Slot length as defined in the PCB layout" at 62.804,-82.637 h1.52

## Text inside footprints (layer, text, board x,y; h text height)
P12: Top Overlay "20" at -54.654,-33.492 h1.27 r180; Top Overlay "19" at -54.654,-30.952 h1.27 r180; Top Overlay "1" at -27.73,-30.952 h1.27 r180; Top Overlay "2" at -27.73,-33.492 h1.27 r180
P59: Top Overlay "6" at -18.792,-13.836 h1.27 r90; Top Overlay "5" at -16.252,-13.836 h1.27 r90; Top Overlay "2" at -18.792,-22.98 h1.27 r90; Top Overlay "1" at -16.252,-22.472 h1.27 r90
P60: Bottom Overlay "20" at -54.654,0.762 h1.27; Bottom Overlay "19" at -54.654,-1.778 h1.27; Bottom Overlay "1" at -27.73,-1.778 h1.27; Bottom Overlay "2" at -27.73,0.762 h1.27
P61: Bottom Overlay "20" at -29.254,0.762 h1.27; Bottom Overlay "19" at -29.254,-1.778 h1.27; Bottom Overlay "1" at -2.33,-1.778 h1.27; Bottom Overlay "2" at -2.33,0.762 h1.27